# Altium PCB PCB1.PcbDoc (part 2 of 2)
Units mil, origin at the board's own origin, x right, y up, seen from the top; angles counter-clockwise.
Board outline 3287.4 x 2559.05 mil, 2 copper layers (Top Layer, Bottom Layer); 88 components, 66 nets, 297 pads, 96 vias.
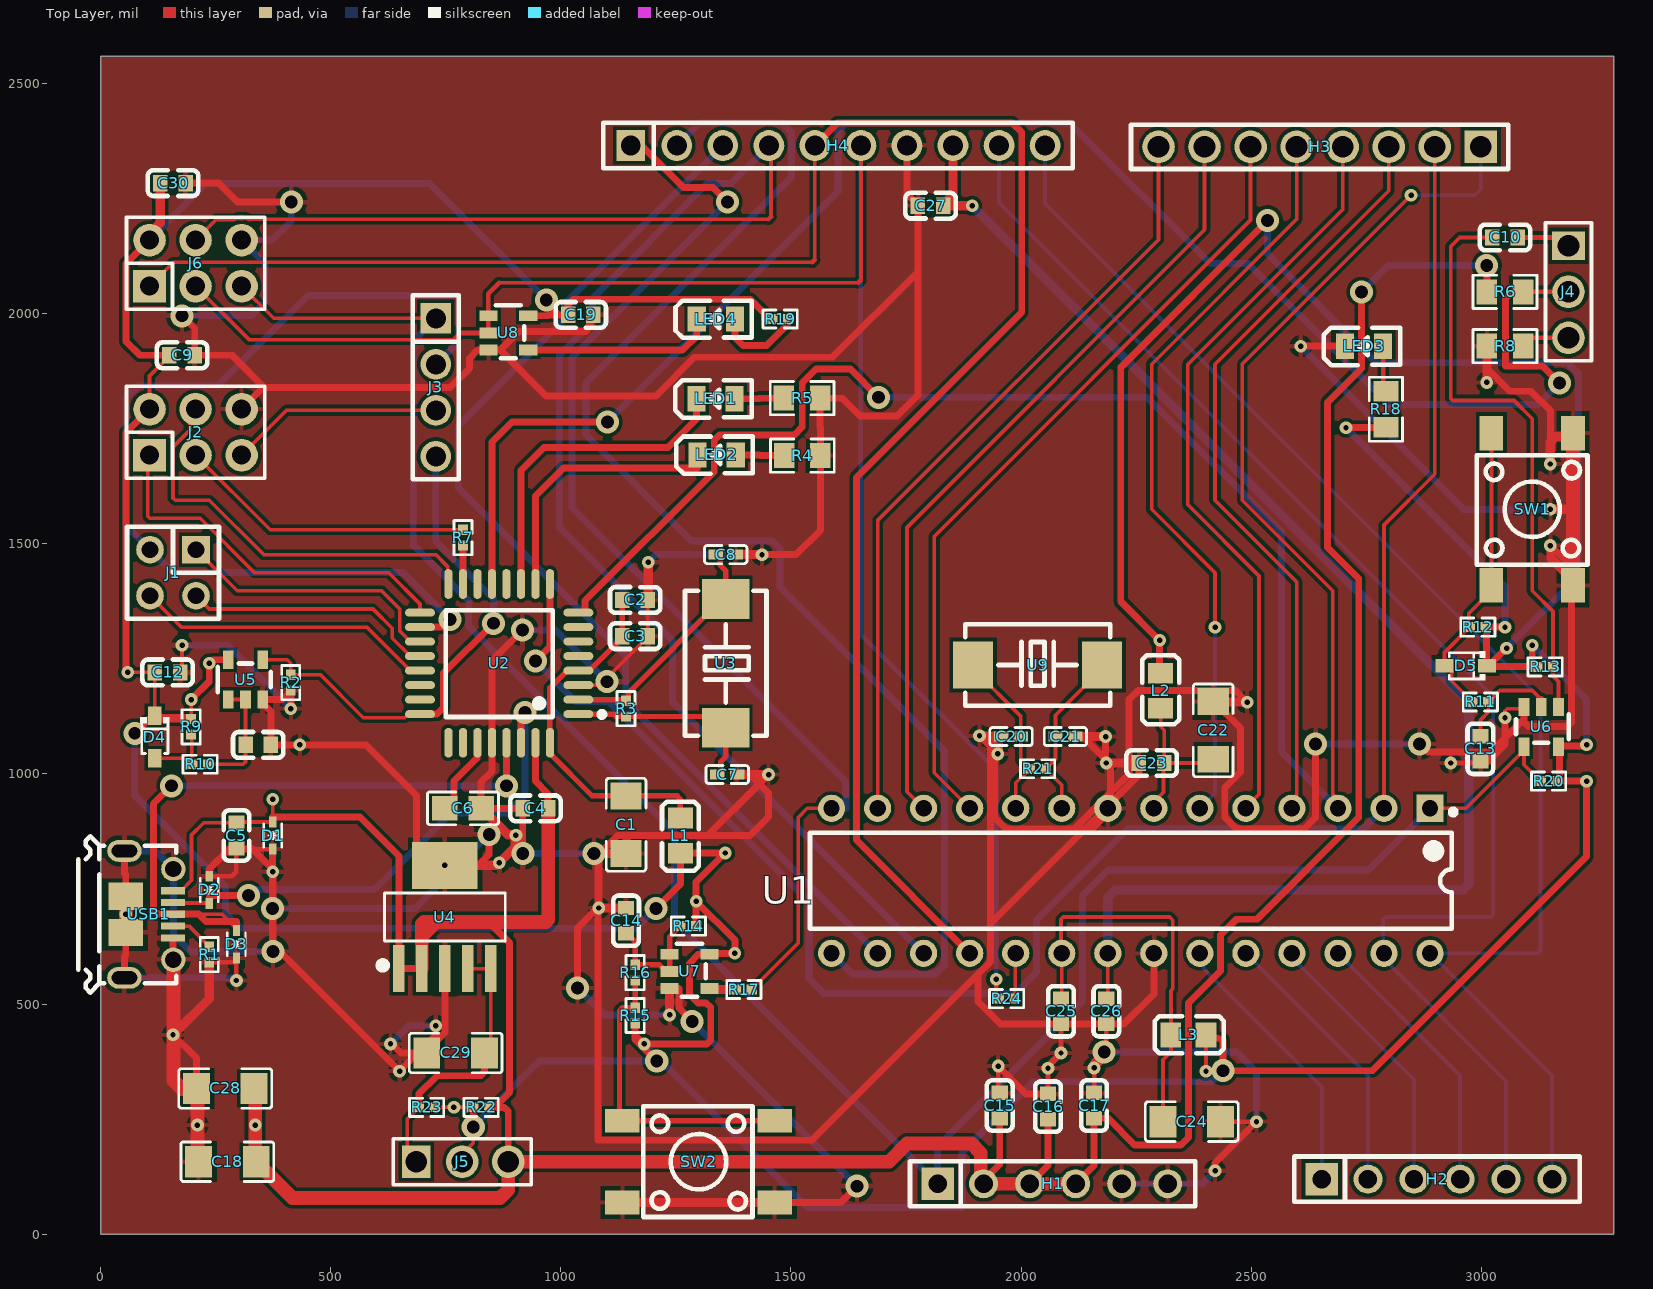
[diagram p0: Top Layer view]

## Via types
v1: diameter 27.56, hole 11.81, Top Layer to Bottom Layer, tented both sides, 61 vias
v2: diameter 50, hole 28, Top Layer to Bottom Layer, 35 vias

## Nets (pads, with @x,y where several pads share a name; then routed paths per layer and width w, separated by ;. In a path a pad name is that pad's centre, name@x,y a point inside that pad or via, vN(x,y) a via of type N, cw(c..) or ccw(c..) an arc to the next point about the centre after c; other vN are vias at no path point) (continued)
GND: (continued)
  Bottom Layer w15: USB1.8 289.36,557.1 v1(295.28,551.18) ; USB1.9 118.9,832.69 USB1.6 158.27,651.3 195.37,614.2 v2(374.37,614.2) ; v1(177.17,1279.53) 275.59,1279.53 v1(413.39,1141.73) ; v2(177.37,1995.2) 327.29,1995.2 357.29,2025.2 357.29,2108.72 J6.6 372.7,2159.53 414.37,2201.2 v2(414.37,2242.2) ; v2(374.01,707.2) 683.37,707.2 v2(844.37,868.2) ; v1(629.92,413.39) 669.29,452.76 v1(728.35,452.76) ; v2(916.37,1312.2) 988.37,1312.2 v2(1100.37,1200.2) ; v2(917.32,826.77) v1(1062.99,826.77) v2(1072.37,826.77) ; v2(1036.37,535.2) 1095.19,476.38 v1(1236.22,476.38) ; v1(1189.79,1459.55) 1206.62,1476.38 v1(1437.01,1476.38) ; v2(1285.37,462.2) v2(1643.37,104.2) ; v2(2180.43,396.2) 2467.37,396.2 2511.34,352.23 v1(2511.34,244.57) ; H1.5 H1.6 2393.03,109.57 v1(2421.26,137.79) ; v1(2607.34,1929.13) 2961.67,1574.8 v1(3149.61,1574.8) ; v2(2639.37,1065.2) v2(2865.37,1065.2)
IO8: H4.1 R17.2 U1.14 | length 2492.8
  Top Layer w8: R17.2 1415.18,531.5 1421.81,538.13 1421.81,538.63 1515.75,632.57 1515.75,905.51 1535.43,925.2 U1.14
  Top Layer w15: H4.1 1175.37,2365.13 1266.31,2274.2 1330.37,2274.2 v2(1362.37,2242.2)
  Bottom Layer w15: v2(1362.37,2242.2) 1024.37,1904.2 1024.37,1577.4 1619.37,982.4 1619.37,925.2 U1.14
MISO: H4.5 J6.1 U1.18 | length 4229.3
  Top Layer w8: J6.1 158.17,2111.22 1546.07,2111.22 ; 1551.93,2117.08 H4.5
  Top Layer w10: 1546.07,2111.22 1551.93,2117.08
  Top Layer w15: H4.5 1600.99,2414.2 1980.37,2414.2 2001.37,2393.2 2001.37,2003.2 1642.37,1644.2 1642.37,856.05 U1.18
MOSI: H4.4 J6.4 U1.17 | length 4999.8
  Top Layer w8: J6.4 251.68,2204.72 ; 1456.69,2210.58 H4.4@1456.69,2360.37 ; 323.53,2204.72 1450.83,2204.72 323.53,2204.72
  Top Layer w10: 1450.83,2204.72 1453.76,2207.65 1456.69,2210.58 ; H4.4 H4.4@1456.69,2360.37 ; 289.43,2204.72 cw(c306.48,2159.53) 323.53,2204.72 ; 289.43,2204.72 cw(c306.48,2159.53) 323.53,2204.72 ; 289.43,2204.72 cw(c306.48,2159.53) 323.53,2204.72 ; 289.43,2204.72 cw(c306.48,2159.53) 323.53,2204.72 ; 289.43,2204.72 251.68,2204.72 289.43,2204.72
  Bottom Layer w15: H4.4 1369.37,2282.57 1317.83,2282.57 1068.44,2033.18 1068.44,1981.64 996.64,1909.84 996.64,1535.6 1242.37,1289.87 1242.37,1156.05 U1.17
NetC1_1: C1.1 C2.2 C3.2 L1.2 U2.4 U2.32 | length 792.7
  Top Layer w11.81: C2.2 C3.2 1124.02,1289.37 1124.02,1286.14 1062.28,1224.41 U2.4 1014,1224.41 976.38,1186.78 U2.32 976.38,1044.03 1068.24,952.17 C1.1 1252.55,952.17 1259.84,944.88 L1.2
NetC6_2: C6.2 U2.27 | length 172.5
  Top Layer w15: C6.2 749.21,925.2 768.29,944.27 768.29,984.82 816.13,1032.67 818.38,1034.91 818.38,1067.14 U2.27
NetC10_2: C10.2 J4.1 | length 117.7
  Top Layer w10: C10.2 3170.87,2165.35 J4.1
NetC22_1: C22.1 C23.1 L2.2 U1.7 | length 411.1
  Top Layer w8: U1.7 2288.19,939.01 2309.27,960.1 2309.27,1021.87 C23.1 2408.85,1023.62 C22.1 ; L2.2 2303.15,1102.36 2310.87,1094.65 ; 2310.87,1094.65 2310.87,1023.62 2310.87,1094.65
NetC24_2: C24.2 C25.2 L3.2 U1.20 | length 868.1
  Top Layer w8: C25.2 2088.19,513.38 U1.20 2086.61,611.81 2086.61,684.29 2091.3,688.98 2322.83,688.98 2329.59,682.22 2329.59,532.93 2325.49,528.84 L3.2 2325.49,396.36 2308.03,378.89 C24.2
NetD4_2: D4.2 R9.2 R10.1 | length 152.2
  Top Layer w8: D4.2 186.1,1033.87 198.99,1020.98 R10.1 198.17,1022.3 198.17,1084 R9.2
NetD5_2: D5.2 R11.1 R12.1 SW1.1 SW1.2 | length 656.4
  Top Layer w8: R11.1 2980.16,1156.36 2935.21,1201.31 2935.21,1223.82 2924.45,1234.59 D5.2 2919.53,1263.84 2974.58,1318.9 2972.44,1321.04 2972.44,1348.43 3021.66,1397.64 SW1.1 SW1.2
NetH2_1: H2.1 U1.23 | length 600.5
  Bottom Layer w8: U1.23 2396.56,601.86 2396.56,575.88 2653.43,319.01 H2.1
NetH2_2: H2.2 U1.24 | length 600.5
  Bottom Layer w8: U1.24 2753.43,345 H2.2
NetH2_3: H2.3 U1.25 | length 600.5
  Bottom Layer w8: U1.25 2588.19,600.79 2853.43,335.55 H2.3
NetH2_4: H2.4 U1.26 | length 600.5
  Bottom Layer w8: U1.26 2953.43,345 H2.4
NetH2_5: H2.5 H4.9 U1.27 | length 3038
  Bottom Layer w8: H4.9 1951.93,2240.98 3031.5,1161.42 3031.5,1139.4 3025.53,1133.43 3025.53,694.94 3019.56,688.98 2791.59,688.98 2786.9,684.29 2786.9,611.52 U1.27 2788.19,597.64 3053.43,332.4 H2.5
NetH2_6: H2.6 H4.10 U1.28 | length 3038.4
  Bottom Layer w8: H4.10 2051.93,2239.41 3128.11,1163.23 3128.11,614.92 3123.42,610.24 U1.28 3153.43,345 H2.6
NetH3_3: H3.3 U1.4 | length 1670.9
  Top Layer w8: U1.4 2597.96,934.96 2597.96,954.94 2598.43,955.41 2598.43,1417.32 2421.26,1594.49 2421.26,1889.76 2798.43,2266.93 H3.3
NetH3_4: H3.4 U1.5 | length 1651.9
  Top Layer w8: U1.5 2488.19,927.27 2516.52,955.6 2516.52,1430.14 2362.2,1584.45 2362.2,1889.76 2698.43,2225.98 H3.4
NetH3_5: H3.5 U1.6 | length 1638.2
  Top Layer w8: v1(2421.26,1318.9) 2421.26,1437.01 2283.46,1574.8 2283.46,1889.76 2598.43,2204.72 H3.5
  Bottom Layer w8: U1.6 2388.19,925.27 2421.26,958.34 v1(2421.26,1318.9)
NetH3_6: H3.6 U1.11 | length 1753.7
  Top Layer w8: U1.11 1811.02,1002.36 1811.02,1515.75 2498.43,2203.15 H3.6
NetH3_7: H3.7 U1.12 | length 1719.8
  Top Layer w8: U1.12 1751.97,961.42 1751.97,1535.43 2398.43,2181.89 H3.7
NetH3_8: H3.8 U1.13 | length 1689.8
  Top Layer w8: U1.13 1688.19,1550.39 2298.43,2160.63 H3.8
NetH4_2: H4.2 U1.15 | length 2969
  Bottom Layer w15: H4.2 1300.99,2414.2 1480.37,2414.2 1501.37,2393.2 1501.37,2297.2 1054.49,1850.32 1054.49,1735.73 1284.02,1506.2 1459.37,1506.2 1476.37,1489.2 1476.37,1406.2 1833.37,1049.2 1833.37,585.2 1813.37,565.2 1633.23,565.2 U1.15
NetH4_3: H4.3 U1.16 | length 2370.3
  Bottom Layer w15: H4.3 1008.74,2021.95 1008.74,1988.82 777.19,1757.26 777.19,1620.85 1140.92,1257.12 1140.92,1157.51 U1.16
NetJ4_3: J4.3 R8.2 | length 106.4
  Top Layer w10: R8.2 3090.55,1929.95 3107.85,1947.24 J4.3
NetLED1_1: LED1.1 R5.1 | length 107.7
  Top Layer w15: LED1.1 1430.37,1814.96 1431.55,1816.15 R5.1
NetLED2_1: LED2.1 R4.1 | length 105.9
  Top Layer w15: LED2.1 1431.37,1692.91 1432.87,1691.41 R4.1
NetLED3_1: LED3.1 R18.1 | length 100.1
  Top Layer w8: R18.1@2786.49,1837.57 R18.1
  Top Layer w10: R18.1@2786.49,1837.57 LED3.1
NetLED4_1: LED4.1 R19.1 | length 193.1
  Top Layer w15: LED4.1 1377.95,1948.03 1395.37,1930.61 1446.84,1930.61 1493.42,1977.2 R19.1
NetLED4_2: LED4.2 U8.4 | length 415.9
  Top Layer w15: U8.4 1264.65,1920.47 1295.25,1951.08 LED4.2
NetR1_1: R1.1 USB1.4 | length 97.5
  Top Layer w8: USB1.4 192.07,669.29 236.22,625.14 R1.1
NetR7_2: R7.2 U2.15 | length 83.4
  Top Layer w15: U2.15 R7.2
NetR15_2: R15.2 R16.1 SW2.1 SW2.2 | length 667.4
  Top Layer w11.81: SW2.1 1127.46,252.46 1127.46,485.21 1134.38,492.13 R15.2 R16.1 ; SW2.1@1134.35,246.54 SW2.2@1464.08,246.54
NetR17_1: R17.1 U7.4 | length 58.6
  Top Layer w20: U7.4 1330.71,533.47 1332.68,531.5 R17.1
NetR24_1: R24.1 U1.19 | length 99.5
  Top Layer w8: R24.1 1986.87,513.13 1986.87,608.91 U1.19
RXD: H3.1 U1.3 U2.8 | length 4474.6
  Top Layer w8: U1.3 2678.42,934.96 2678.42,954.16 2677.17,955.41 2677.17,1397.64 2480.31,1594.49 2480.31,1890.45 v1(2847.01,2257.14)
  Top Layer w15: U2.8 1052.37,1350.39 1052.37,1376.2 1333.37,1657.2 1333.37,1725.2 1344.37,1736.2 1507.37,1736.2 1524.37,1753.2 1524.37,1849.2 1554.37,1879.2 1629.37,1879.2 v2(1690.37,1818.2)
  Bottom Layer w8: v1(2847.01,2257.14) 2985.49,2257.14 2998.43,2270.08 H3.1
  Bottom Layer w15: v2(1690.37,1818.2) 2273.78,1818.2 2565.37,1526.6 2565.37,1048.01 U1.3
SCK: H4.6 J6.3 R24.2 U8.1 U8.2 | length 3866.9
  Top Layer w8: J6.3 322.58,1943.42 767.14,1943.42 ; 866.14,2066.93 1646.07,2066.93 ; 1651.93,2072.79 H4.6
  Top Layer w10: 767.14,1943.42 781.59,1957.87 U8.2 U8.1 842.52,2043.3 866.14,2066.93 ; 1646.07,2066.93 1651.93,2072.79 ; v1(1945.79,554.21) 1945.79,517.44 R24.2@1951.42,511.81
  Bottom Layer w10: H4.6 1651.93,1302.5 1945.79,1008.64 v1(1945.79,554.21)
TXD: H3.2 U1.2 U2.9 | length 4136
  Top Layer w8: U1.2 2788.19,1540.68 2898.43,1650.91 H3.2
  Top Layer w15: v2(944.55,1245.2) 976.38,1277.03 U2.9
  Bottom Layer w15: v2(944.55,1245.2) 1032.25,1157.5 1103.06,1157.5 1539.37,721.2 1539.37,555.2 1571.37,523.2 1987.37,523.2 2033.37,569.2 2033.37,682.2 2231.37,880.2 2743.19,880.2 U1.2
USB_DN-: D2.2 U2.30 USB1.2 | length 1122.5
  Top Layer w8: USB1.2 158.47,719.5 235.23,719.5 D2.2
  Top Layer w15: D2.2 236.22,736.2 v2(321.68,736.2) ; U2.30 913.39,1124.21 v2(922.37,1133.2)
  Bottom Layer w15: v2(321.68,736.2) 334,748.52 594.69,748.52 761.37,915.2 884.37,915.2 922.37,953.2 v2(922.37,1133.2)
USB_DP+: D3.2 U2.29 USB1.3 | length 1468.6
  Top Layer w8: USB1.3 157.55,694.82 263.84,694.82 295.27,663.38 D3.2
  Top Layer w15: v2(154.37,974.2) 115.37,935.2 115.37,703.2 123.37,695.2 213.37,695.2 229.37,679.2 295.27,679.2 D3.2@295.27,663.38 ; v2(881.89,974.2) U2.29
  Bottom Layer w15: v2(154.37,974.2) v2(881.89,974.2)
USER_BUF_BUTTON: C14.2 R14.1 R16.2 U7.1 U7.2 | length 266.9
  Top Layer w11.81: C14.2 1143.7,653.54 1161.42,635.82 R16.2 1213.95,585.26 1228.34,570.87 U7.2 U7.1 1236.22,646.17 1259.34,669.29 R14.1
pads on no net: U2.5 U2.6 U2.7 U2.12 U2.14 U2.22 U2.23 U2.25 U2.26

## Polygon pours and split planes (outlines as drawn)
GND on Top Layer "GND_L01_P000" (solid, pour order 0): 0,2559.06 0,0 3287.4,0 3287.4,2559.06
GND on Bottom Layer "GND_L02_P001" (solid, pour order 1): 0,2559.06 0,0 3287.4,0 3287.4,2559.06

## Silkscreen, mask and mechanical layers (free items; w line width, h text height)
Mechanical 1:
  lines w10: 0,0 0,2559.05 3287.4,2559.05 3287.4,0 20.1,0 0,0